# Altium PCB PCB1.PcbDoc
Units mm, origin at the board's own origin, x right, y up, seen from the top; angles counter-clockwise.
Board outline 54.3 x 40 mm, 4 copper layers (Top Layer, Signal Layer 1, Signal Layer 2, Bottom Layer), stack 0.778 mm thick; 40 components, 46 nets, 218 pads, 112 vias.
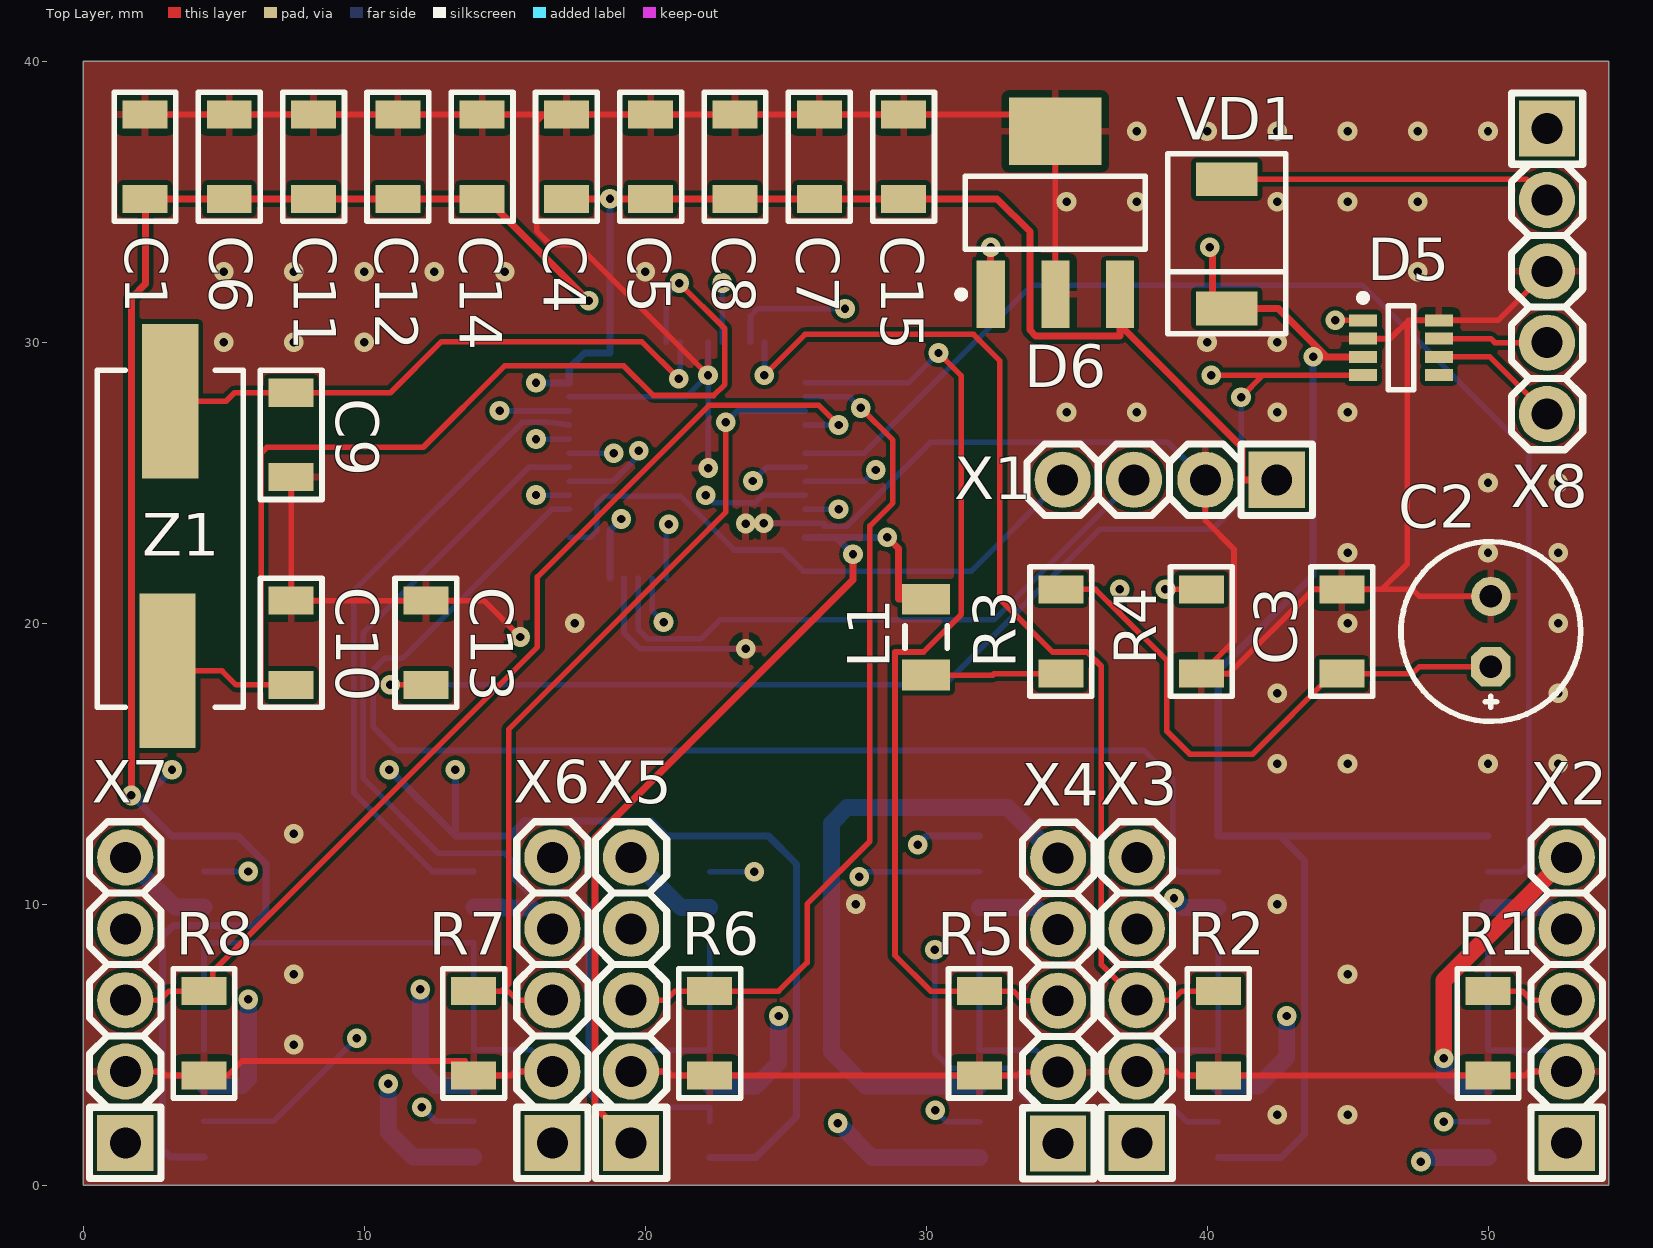
[diagram p0: Top Layer view]
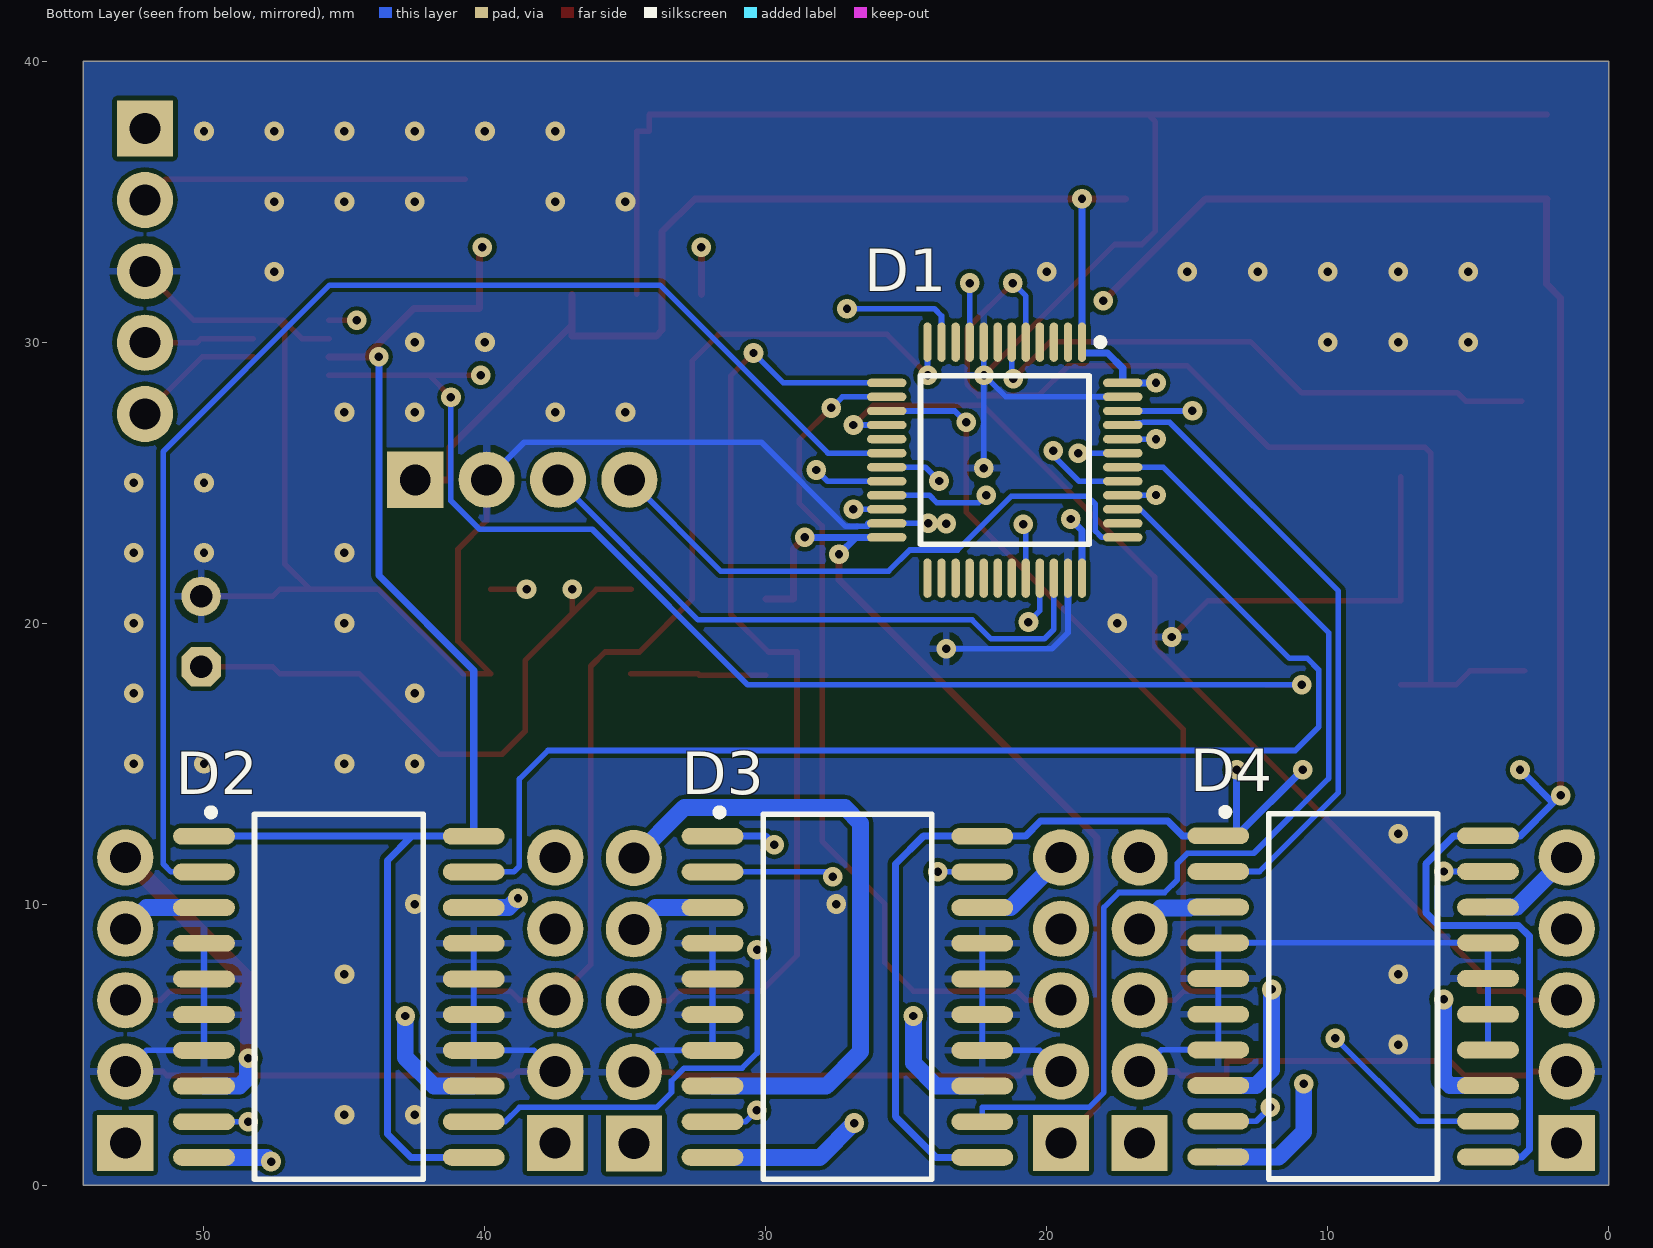
[diagram p1: Bottom Layer view, seen from below]
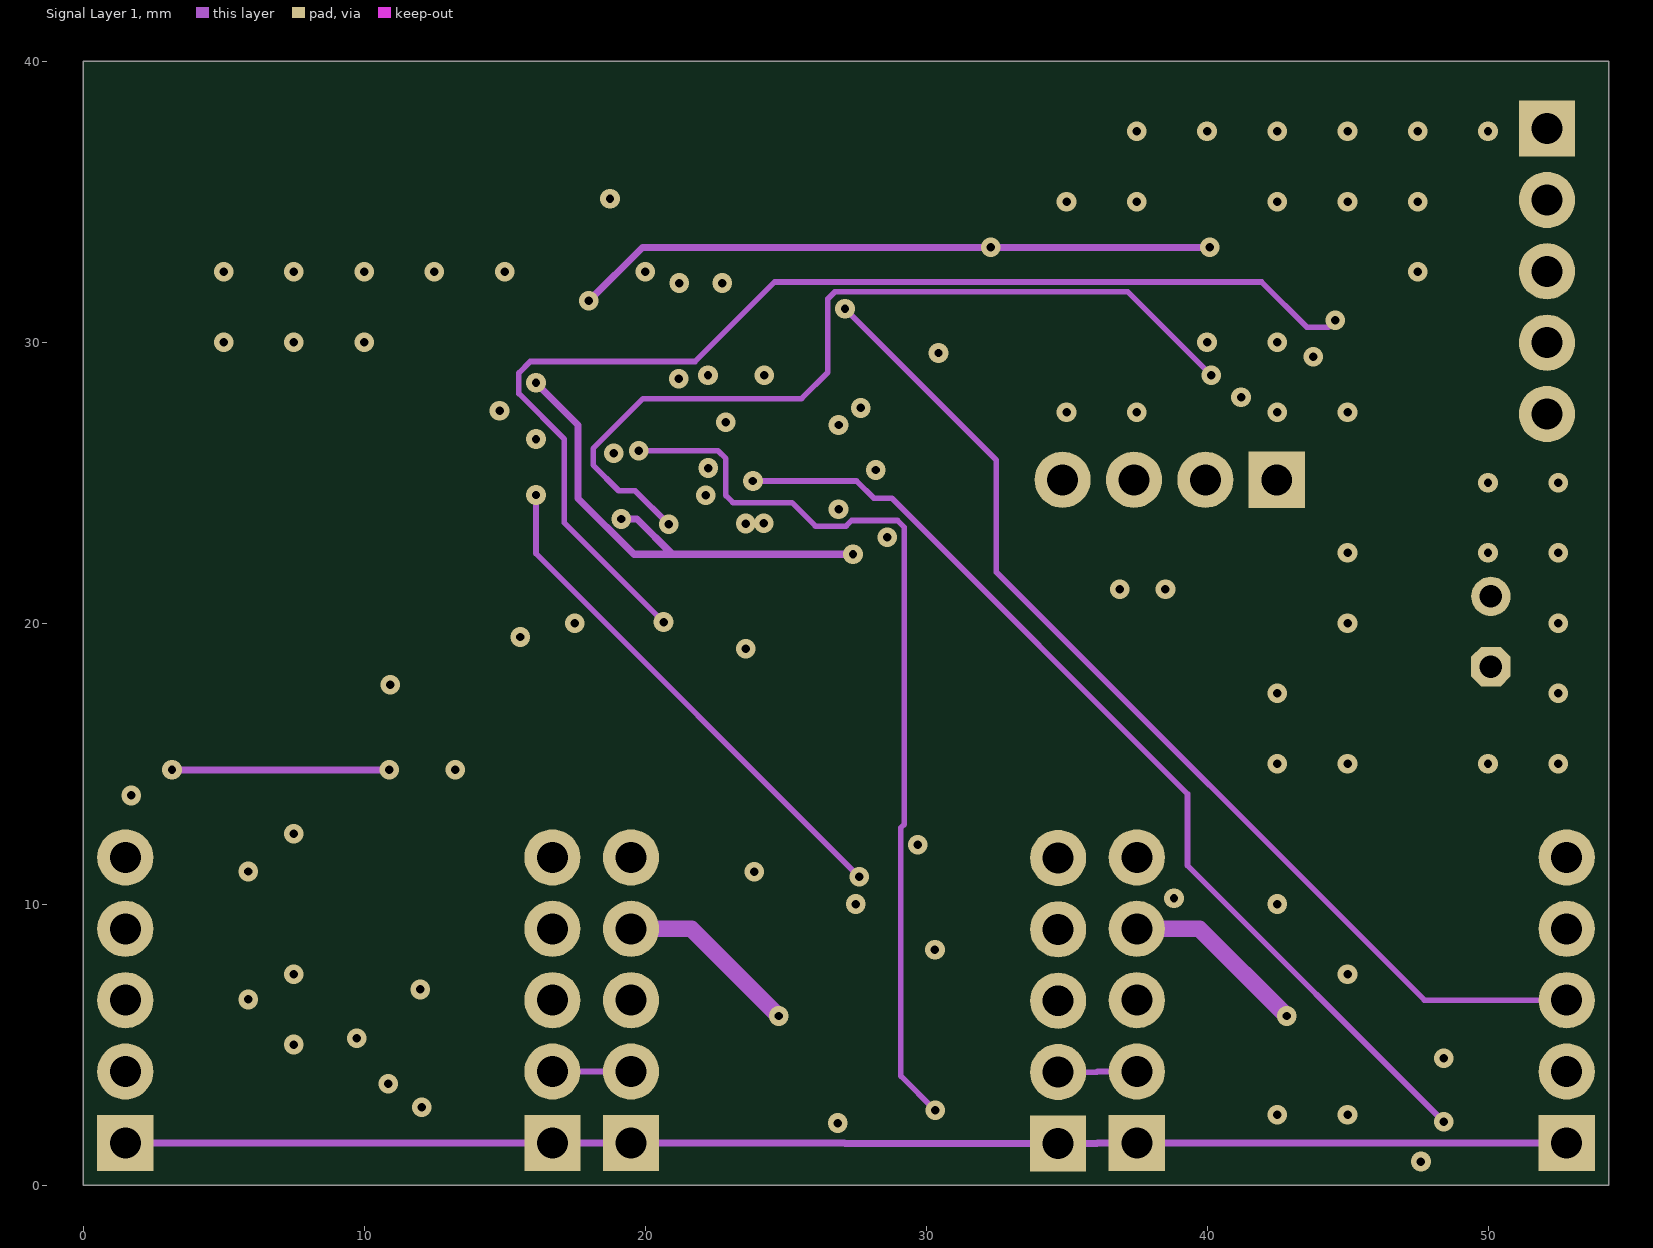
[diagram p2: Signal Layer 1]
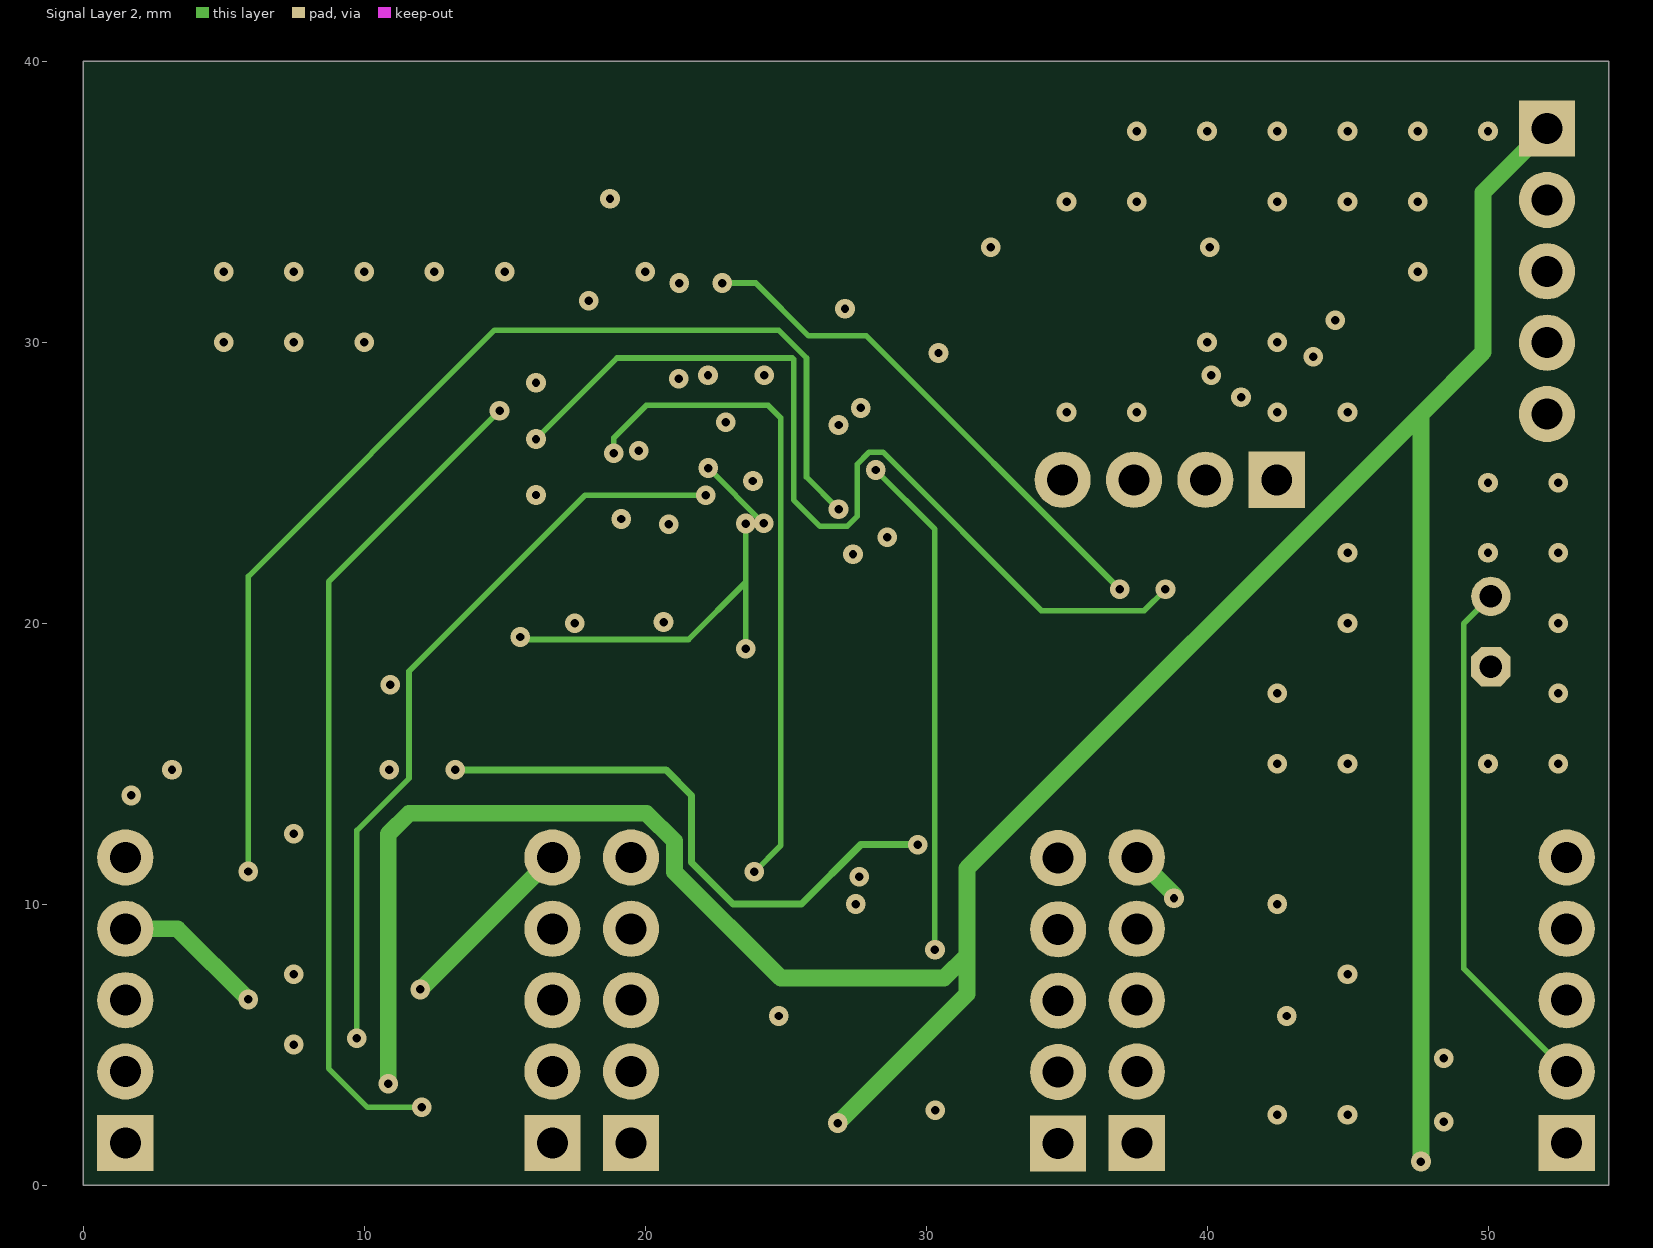
[diagram p3: Signal Layer 2]
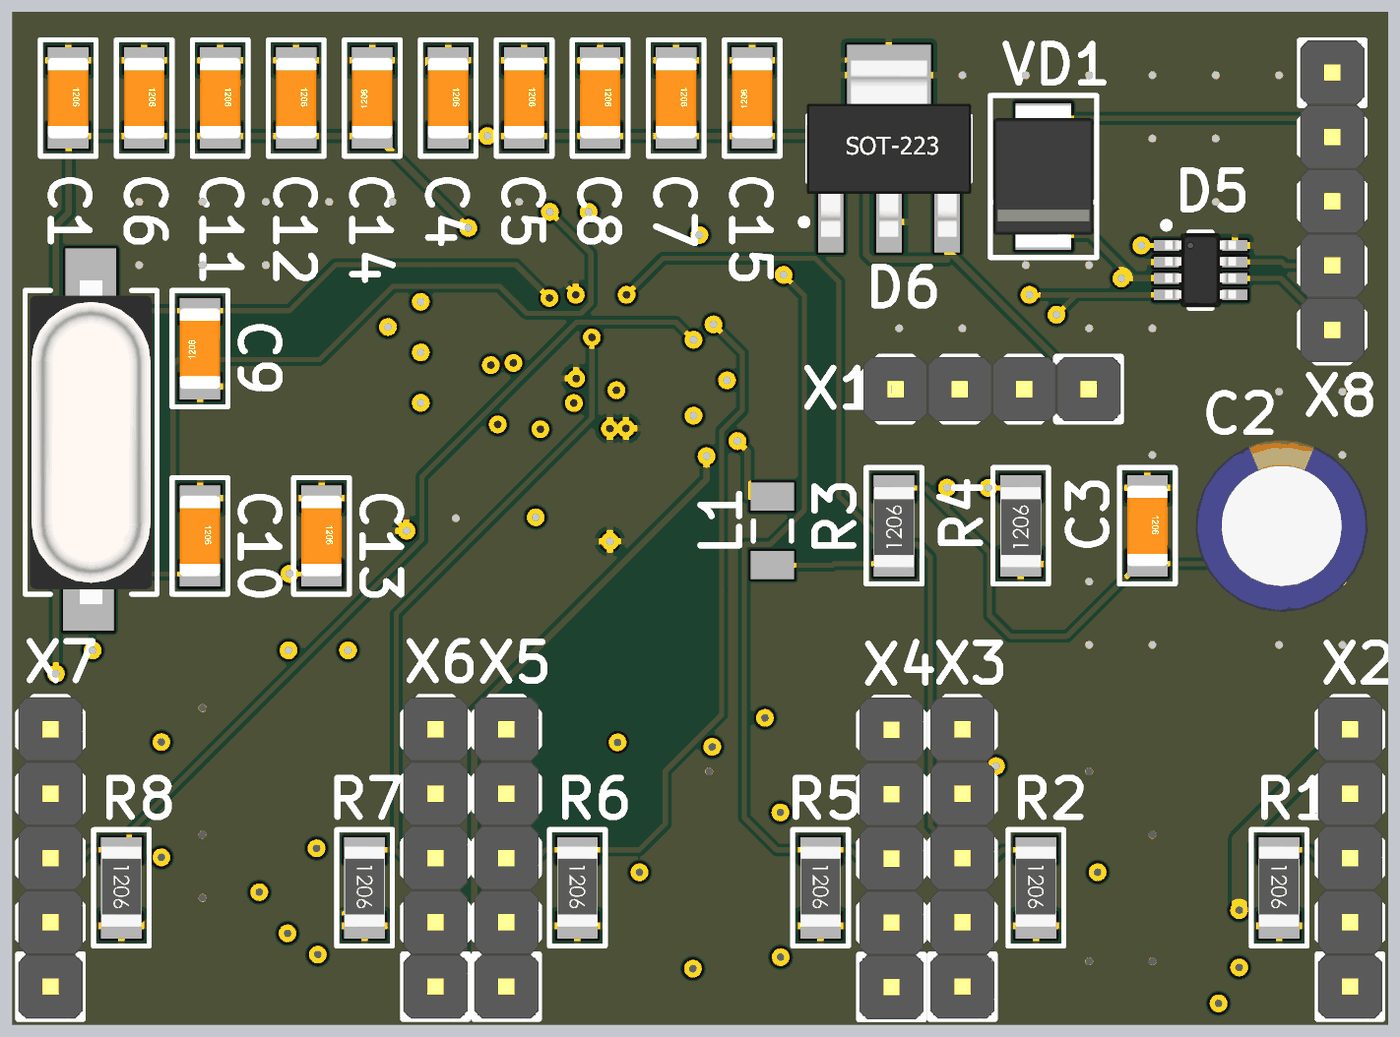
[diagram p4: 3D render of the assembled board from above, using the file's embedded part models]
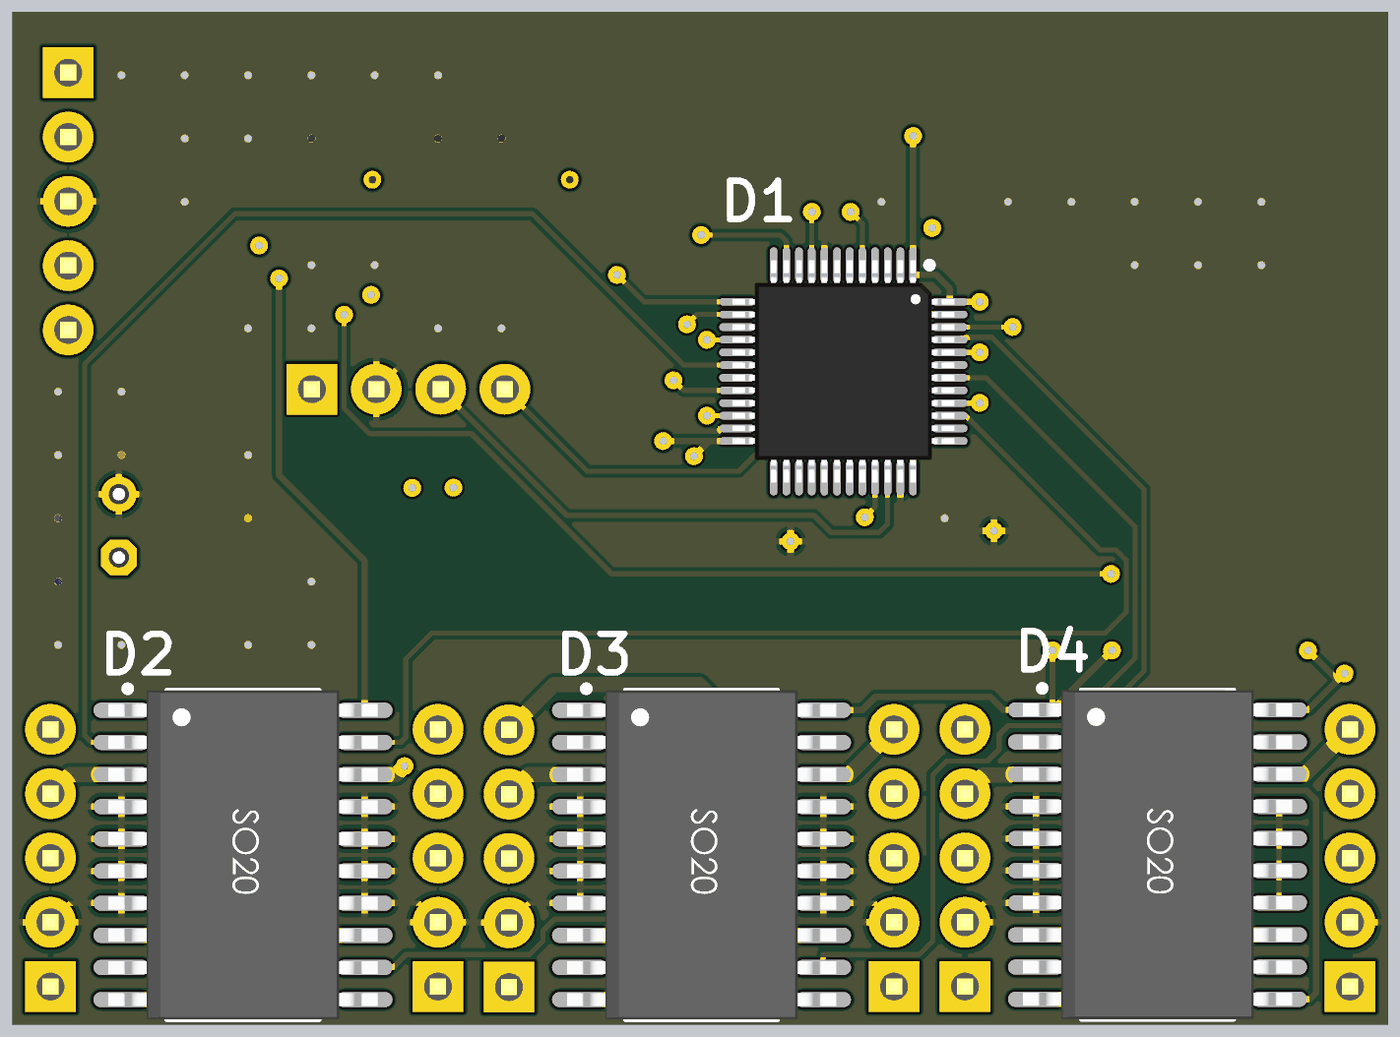
[diagram p5: 3D render of the assembled board from below, using the file's embedded part models]

## Layer stack, top to bottom
Top Solder: solder mask 0.0102, Solder Resist, Dk 3.5
Top Layer: signal copper 0.0356
Dielectric 1: core 0.254, FR-4, Dk 4.2
Signal Layer 1: signal copper 0.036
Dielectric 3: prepreg 0.127, Dk 4.2
Signal Layer 2: signal copper 0.036
Dielectric 2: core 0.254, Dk 4.2
Bottom Layer: signal copper 0.0356
Bottom Solder: solder mask 0.0102, Solder Resist, Dk 3.5

## Board outline
0,0 0,40 54.3,40 54.3,0

## Design rules (kind name [scope] priority, off if disabled: settings)
Clearance [All] p1: gap=0.15 ignorepadtopadclearanceinfootprint=FALSE
DiffPairsRouting [All] p1: maxlimit=0.7 minlimit=0.25 mostfreqgap=0.4 toplayer_minwidth=0.381 toplayer_maxwidth=0.381 toplayer_prefwidth=0.381 midlayer1_minwidth=0.381 midlayer1_maxwidth=0.381 midlayer1_prefwidth=0.381 midlayer2_minwidth=0.381 midlayer2_maxwidth=0.381 midlayer2_prefwidth=0.381 bottomlayer_minwidth=0.381 bottomlayer_maxwidth=0.381 bottomlayer_prefwidth=0.381 maxuncoupledlength=12.7
PolygonConnect [All] p1: connectstyle=Relief reliefconductorwidth=0.254 reliefentries=4 polygonreliefangle="90 Angle" airgapwidth=0.254
RoutingVias [All] p1: holewidth=0.3 width=0.7 viastyle="Through Hole" minholewidth=0.3 minwidth=0.7 maxholewidth=0.3 maxwidth=0.7
SolderMaskExpansion [All] p1: expansion=0.102
Width "Width M6-" [InNet('Motor6_M-')] p1: maxlimit=1 minlimit=0.4 preferedwidth=0.6
Width "Width M6+" [InNet('Motor6_M+')] p2: maxlimit=1 minlimit=0.4 preferedwidth=0.6
Width "Width M5-" [InNet('Motor5_M-')] p3: maxlimit=1 minlimit=0.4 preferedwidth=0.6
Width "Width M5+" [InNet('Motor5_M+')] p4: maxlimit=1 minlimit=0.4 preferedwidth=0.6
Width "Width M4-" [InNet('Motor4_M-')] p5: maxlimit=1 minlimit=0.4 preferedwidth=0.6
Width "Width M4+" [InNet('Motor4_M+')] p6: maxlimit=1 minlimit=0.4 preferedwidth=0.6
Width "Width M3-" [InNet('Motor3_M-')] p7: maxlimit=1 minlimit=0.4 preferedwidth=0.6
Width "Width M3+" [InNet('Motor3_M+')] p8: maxlimit=1 minlimit=0.4 preferedwidth=0.6
Width "Width M2-" [InNet('Motor2_M-')] p9: maxlimit=1 minlimit=0.4 preferedwidth=0.6
Width "Width M2+" [InNet('Motor2_M+')] p10: maxlimit=1 minlimit=0.4 preferedwidth=0.6
Width "Width M1-" [InNet('Motor1_M-')] p11: maxlimit=1 minlimit=0.4 preferedwidth=0.6
Width "Width M1+" [InNet('Motor1_M+')] p12: maxlimit=1 minlimit=0.4 preferedwidth=0.6
Width "Width 12V6" [InNet('12V6')] p13: maxlimit=1 minlimit=0.4 preferedwidth=0.6
Width "Width 5V" [InNet('5V')] p14: maxlimit=1 minlimit=0.2 preferedwidth=0.25
Width "Width 3V3 Pri" [InNet('3V3 Primary')] p15: maxlimit=1 minlimit=0.2 preferedwidth=0.25
Width "Width 3V3" [InNet('3V3')] p16: maxlimit=1 minlimit=0.2 preferedwidth=0.25
Width [All] p17: maxlimit=1 minlimit=0.17 preferedwidth=0.2
29 further rules are at their usual default settings.

## Components (designator, comment, footprint, x,y, rotation, side; value= is the part's Value field where it differs from the comment)
C1 "100nF" CH1206C 2.2,36.6 r270 top
C2 "1µF" D6.3C2.5H11 50.1,19.7 r90 top
C3 "100nF" CH1206C 44.8,19.7 r270 top
C4 "100nF" CH1206C 17.2,36.6 r270 top
C5 "100nF" CH1206C 20.2,36.6 r270 top
C6 "100nF" CH1206C 5.2,36.6 r270 top
C7 "100nF" CH1206C 26.2,36.6 r270 top
C8 "100nF" CH1206C 23.2,36.6 r270 top
C9 "33pF" CH1206C 7.4,26.7 r90 top
C10 "33pF" CH1206C 7.4,19.3 r270 top
C11 "100nF" CH1206C 8.2,36.6 r270 top
C12 "100nF" CH1206C 11.2,36.6 r270 top
C13 "33pF" CH1206C 12.2,19.3 r270 top
C14 "0.47µF" CH1206C 14.2,36.6 r90 top
C15 "47µF" CH1206C 29.2,36.6 r90 top
D1 "STM32F103C8T6" 48-LQFP 21.5,25.8 r270 bottom
D2 "L293D" "20-SOIC (W)" 45.2,6.7 r180 bottom
D3 "L293D" "20-SOIC (W)" 27.1,6.7 r180 bottom
D4 "L293D" "20-SOIC (W)" 9.1,6.715 r180 bottom
D5 "MCP2551" SOT23-8 46.9,29.8 r0 top
D6 "LM3940" SOT223 34.6,34.6 r90 top
L1 "BLM31PG500SN1L" C1206 30,19.5 r90 top value="Ferrite Bead"
R1 "220" CH1206R 50,5.4 r270 top
R2 "220" CH1206R 40.4,5.4 r270 top
R3 "47" CH1206R 34.8,19.7 r90 top
R4 "10k" CH1206R 39.8,19.7 r90 top
R5 "220" CH1206R 31.9,5.4 r270 top
R6 "220" CH1206R 22.3,5.4 r270 top
R7 "220" CH1206R 13.9,5.4 r270 top
R8 "220" CH1206R 4.3,5.4 r270 top
VD1 "STPS4S200UF" DO221AA 40.7,33.5 r270 top
X1 "SWD" "CON: PLS-4" 38.67,25.1 r180 top
X2 "Motor1" "CON: PLS-5" 52.8,6.58 r90 top
X3 "Motor2" "CON: PLS-5" 37.5,6.58 r90 top
X4 "Motor3" "CON: PLS-5" 34.7,6.56 r90 top
X5 "Motor4" "CON: PLS-5" 19.5,6.58 r90 top
X6 "Motor5" "CON: PLS-5" 16.7,6.58 r90 top
X7 "Motor6" "CON: PLS-5" 1.5,6.58 r90 top
X8 "0533750510" "CON: PLS-5" 52.1,32.52 r270 top
Z1 "8MHz" HC-49/US 3.1,23 r270 top

## Footprints (in the part's own frame and the unit in brackets; to place one, negate y for a bottom-side part, rotate by r counter-clockwise, add the part's x,y. Pads: shape width x height; smd on the part's side, far side on the other; paste and mask are expansions set on the pad)
"20-SOIC (W)" [mm]
  rrect100% 2.2x0.6 smd: 1(-4.8,5.715) 2(-4.8,4.445) 3(-4.8,3.175) 4(-4.8,1.905) 5(-4.8,0.635) 6(-4.8,-0.635) 7(-4.8,-1.905) 8(-4.8,-3.175) 9(-4.8,-4.445) 10(-4.8,-5.715) 11(4.8,-5.715) 12(4.8,-4.445) 13(4.8,-3.175) 14(4.8,-1.905) 15(4.8,-0.635) 16(4.8,0.635) 17(4.8,1.905) 18(4.8,3.175) 19(4.8,4.445) 20(4.8,5.715)
  round 0.5 on Mech2: ""(-4.7,5.9)
  silkscreen extent -4.68,-6.5 3,6.69, body extent -5.31,-6.5 5.32,6.5, height 2.66
48-LQFP [mm] "QFP, 48-Leads, Body 7x7mm, Pitch 0.5mm, IPC Medium Density"
  oval 1.4x0.3 smd: 1(-4.2,2.75) 2(-4.2,2.25) 3(-4.2,1.75) 4(-4.2,1.25) 5(-4.2,0.75) 6(-4.2,0.25) 7(-4.2,-0.25) 8(-4.2,-0.75) 9(-4.2,-1.25) 10(-4.2,-1.75) 11(-4.2,-2.25) 12(-4.2,-2.75) 25(4.2,-2.75) 26(4.2,-2.25) 27(4.2,-1.75) 28(4.2,-1.25) 29(4.2,-0.75) 30(4.2,-0.25) 31(4.2,0.25) 32(4.2,0.75) 33(4.2,1.25) 34(4.2,1.75) 35(4.2,2.25) 36(4.2,2.75)
  round 0.5 on Mech2: 2(-4,4)
  oval 0.3x1.4 smd: 13(-2.75,-4.2) 14(-2.25,-4.2) 15(-1.75,-4.2) 16(-1.25,-4.2) 17(-0.75,-4.2) 18(-0.25,-4.2) 19(0.25,-4.2) 20(0.75,-4.2) 21(1.25,-4.2) 22(1.75,-4.2) 23(2.25,-4.2) 24(2.75,-4.2) 37(2.75,4.2) 38(2.25,4.2) 39(1.75,4.2) 40(1.25,4.2) 41(0.75,4.2) 42(0.25,4.2) 43(-0.25,4.2) 44(-0.75,4.2) 45(-1.25,4.2) 46(-1.75,4.2) 47(-2.25,4.2) 48(-2.75,4.2)
  silkscreen extent -4.32,-3 3,3.52, body extent -4.39,-4.39 4.39,4.39, height 1.55
C1206 [mm] "Chip Capacitor, Body 3.2x1.6mm, IPC High Density"
  rect 1.1x1.7 smd: 1(-1.35,0) 2(1.35,0)
  silkscreen extent -0.4,-0.75 0.4,0.75, body extent -1.7,-0.9 1.7,0.9, height 1.3
CH1206C [mm] "Non polar chip capacitor, size 1206"
  rect 1x1.6 smd: 1(-1.5,0) 2(1.5,0)
  silkscreen extent -2.3,-1.1 2.3,1.1, body extent -1.6,-0.8 1.6,0.8, height 1
CH1206R [mm] "Chip Resistor, 2-Leads, Body 3,0x1,5mm, IPC Low Density"
  rect 1x1.6 smd: 1(-1.5,0) 2(1.5,0)
  silkscreen extent -2.3,-1.1 2.3,1.1, body extent -1.65,-0.8 1.55,0.8, height 0.47
"CON: PLS-4" [mm] "PLS-40 4 pin header"
  rect 2x2 hole 1.1: 1(-3.81,0)
  round 2 hole 1.1: 2(-1.27,0) 3(1.27,0) 4(3.81,0)
  silkscreen extent -5.08,-1.27 5.08,1.27, body extent -5.08,-1.27 5.08,1.27, height 8.54
"CON: PLS-5" [mm]
  rect 2x2 hole 1.1: 1(-5.08,0)
  round 2 hole 1.1: 2(-2.54,0) 3(0,0) 4(2.54,0) 5(5.08,0)
  silkscreen extent -6.35,-1.27 6.35,1.27, body extent -6.35,-1.27 6.35,1.27, height 8.54
D6.3C2.5H11 [mm] "Polar capacitor, diameter 6.3 mm, leads clearance 2.5 mm, height 11 mm"
  oct 1.4x1.4 hole 0.8: 1(-1.25,0)
  round 1.4 hole 0.8: 2(1.25,0)
  silkscreen extent -3.2,-3.2 3.2,3.2, body extent -3.4,-3.4 3.4,3.4, height 12.5
DO221AA [mm]
  rect 1.2x2.2 smd: 1(-2.3,0) 2(2.3,0)
  silkscreen extent -3.2,-2.1 3.2,2.1, body extent -2.8,-1.97 2.8,1.98, height 1.1
HC-49/US [mm] "Resonator"
  rect 5.5x2 smd: 1(-4.9,0) 3(4.7,-0.1)
  round 0.5 on Mech1: ""(-4.2,-1.9)
  silkscreen extent -6,-2.6 6,2.6, body extent -6.4,-2.42 6.4,2.41, height 4.3
SOT23-8 [mm] "8-Lead Small Outline Transistor Package [SOT-23]"
  rect 1x0.42 smd: 1(-1.35,0.975) 2(-1.35,0.325) 3(-1.35,-0.325) 4(-1.35,-0.975) 5(1.35,-0.975) 6(1.35,-0.325) 7(1.35,0.325) 8(1.35,0.975)
  round 0.5 on Mech1: ""(-0.9,1)
  silkscreen extent -1.47,-1.5 0.45,1.9, body extent -1.4,-1.47 1.4,1.47, height 1.2
SOT223 [mm] "SOT223, 4-Leads, Body 6,50x7,00mm (avg), Pitch 2,30mm, IPC Medium Density"
  rect 2.4x1 smd: 1(-2.9,2.3) 2(-2.9,0) 3(-2.9,-2.3)
  rect 2.4x3.3 smd: 4(2.9,0)
  round 0.5 on Mech1: ""(-3,2.7)
  silkscreen extent -3.02,-3.2 1.3,3.47, body extent -3.48,-3.25 3.48,3.25, height 1.65

## Part data
C1 C3 C4 C5 C6 C7 C8 C9 C10 C11 C12 C13 C15: library part Capacitor, Manufacturer="Murata Electronics North America"
  C1 C3 C4 C5 C6 C7 C8 C11 C12: ComponentKind=1206, HelpURL=https://www.digikey.com/product-detail/en/GRM31M7U1H104JA01L/490-6524-1-ND/3845721/?itemSeq=292160367, Model=GRM31M7U1H104JA01L
  C9 C10 C13: ComponentKind=1206, HelpURL=https://www.digikey.com/product-detail/en/murata-electronics-north-america/GRM31A7U3A330JW31D/490-11635-1-ND/5333475, Model=GRM31A7U3A330JW31D
  C15: ComponentKind="1206 ±10%", HelpURL=https://www.digikey.com/product-detail/en/murata-electronics-north-america/GRT31CR61A476KE13L/490-12438-1-ND/5417139, Model=GRT31CR61A476KE13L
C2: library part AlumCap, Manufacturer=Nichicon, ComponentKind="D-6.30mm, H-12.50mm, L-2.50mm", HelpURL=https://www.digikey.com/product-detail/en/UPS2D010MED1TD/493-5390-1-ND/3129727/?itemSeq=292930108, Model=UPS2D010MED1TD
C14: library part Capacitor, Manufacturer="Wurth Electronics Inc.", ComponentKind="1206 ±10%", HelpURL=https://www.digikey.com/product-detail/en/wurth-electronics-inc/885012208034/732-7690-1-ND/5454317, Model=885012208034
D1: "Cortex-M3", Manufacturer="ST Microelectronics", ComponentKind=48-LQFP, HelpURL=https://www.digikey.com/product-detail/en/stmicroelectronics/STM32F103C8T6/497-6063-ND/1646338, Model=STM32F103C8T6
D2 D3 D4: "Driver DC", Manufacturer=Chine, ComponentKind=20-SOIC, HelpURL=https://www.aliexpress.com/item/L293DD-SOP-20/32820416384.html?spm=a2g0o.cart.0.0.75653c006KpWLf, Model=L293DD
D5: "CAN Transceiver", Manufacturer=China, ComponentKind=SOT23-8, HelpURL=https://www.aliexpress.com/item/5pcs-lot-MCP2551-I-SN-SOP-8-MCP2551-High-speed-CAN-transceiver-IC-In-Stock/32957904723.html?spm=2114.search0604.3.9.23fb55704Db44W&ws_ab_test=searchweb0_0,searchweb201602_2_10065_10068_319_317_10696_453_10084_454_10083_10618_10307_10301_537_536_10059_10884_10889_10887_321_322_10915_10103_10914_10911_10910,searchweb201603_52,ppcSwitch_0&algo_expid=0b18bd05-c5b2-42c5-a3b0-7fc04afd9d1c-1&algo_pvid=0b18bd05-c5b2-42c5-a3b0-7fc04afd9d1c, Model=MCP2551
D6: "LDO", ComponentKind=SOT-223
L1: library part Inductor, Manufacturer="Murata Electronics North America", ComponentKind="Power Line Ferrite Bead", HelpURL=https://www.digikey.com/product-detail/en/murata-electronics-north-america/BLM31PG500SN1L/490-1055-1-ND/584501, Model=BLM31PG500SN1L
R1 R2 R5 R6 R7 R8: library part Resistor, Manufacturer="Vishay Dale", ComponentKind=1206, HelpURL=https://www.digikey.com/product-detail/en/CRCW1206220RJNEAC/541-4204-1-ND/7928887/?itemSeq=292844989, Model=CRCW1206220RJNEAC
R3: library part Resistor
R4: library part Resistor, Manufacturer="Stackpole Electronics Inc", ComponentKind=1206, HelpURL=https://www.digikey.com/product-detail/en/stackpole-electronics-inc/RMCF1206JT10K0/RMCF1206JT10K0CT-ND/1942803, Model=RMCF1206JT10K0
VD1: library part "Diod Schottky", Manufacturer=STMicroelectronics, ComponentKind="Äèîä Øîòòêè äëÿ çàùèòû îò íåïðàâèëüíîé ïîëÿðíîñòè", HelpURL=https://www.digikey.com/product-detail/en/STPS4S200UF/497-15321-1-ND/5170863/?itemSeq=292860513, Model=STPS4S200UF
X1: library part 4-Connector, Manufacturer=Molex, ComponentKind="Connector Header Through Hole 4 position 0.098\" (2.50mm)", HelpURL=https://www.digikey.com/products/en?keywords=0533750410, Model=0533750410
X2 X3 X4 X5 X6 X7 X8: library part 5-Connector, Manufacturer=Molex, ComponentKind="Connector Header Through Hole 5 position 0.098\" (2.50mm)", HelpURL=https://www.digikey.com/products/en?keywords=0533750510, Model=0533750510
Z1: library part Oscillator, Manufacturer="ECS Inc.", ComponentKind=HC-49/US, HelpURL=https://www.digikey.com/product-detail/en/ecs-inc/ECS-80-20-5PX-TR/XC2076CT-ND/5875560, Model=ECS-80-20-5PX-TR

## Via types
v1: diameter 0.7, hole 0.3, Top Layer to Bottom Layer, 63 vias
v2: diameter 0.7, hole 0.3, Top Layer to Bottom Layer, tented both sides, 49 vias

## Nets (pads, with @x,y where several pads share a name; then routed paths per layer and width w, separated by ;. In a path a pad name is that pad's centre, name@x,y a point inside that pad or via, vN(x,y) a via of type N, cw(c..) or ccw(c..) an arc to the next point about the centre after c; other vN are vias at no path point)
3V3: C4.2 C5.2 C7.2 C8.2 C15.1 D1.1 D1.24 D1.36 D1.48 D6.3 L1.2 X1.1 X2.1 X3.1 X4.1 X5.1 X6.1 X7.1 | length 146.3
  Top Layer w0.25: C4.2 18.681,35.1 v1(18.75,35.1) C5.2 C8.2 C7.2 C15.1 32.524,35.1 33.693,33.932 33.693,30.426 33.896,30.223 36.9,30.223 D6.3@36.9,30.604 ; X5.1 18.224,2.776 18.224,12.367 27.399,21.542 v1(27.399,22.451) ; v1(28.618,23.05) 29.019,22.649 29.019,20.85 L1.2 ; D6.3 D6.3@36.9,30.604 ; X1.1 41.237,25.1 41.237,26.268 D6.3@36.9,30.604
  Signal Layer 1 w0.25: X7.1 X6.1 X5.1 27.089,1.5 27.109,1.48 X4.1 36.08,1.48 36.1,1.5 X3.1 X2.1 ; v1(16.116,28.55) 17.618,27.048 17.618,24.432 19.599,22.451 20.967,22.451 ; v1(19.156,23.705) 19.713,23.705 20.967,22.451 ; v1(27.399,22.451) 20.967,22.451
  Bottom Layer w0.25: v1(16.116,28.55) D1.48 17.3,29.07 17.843,29.614 18.75,29.614 D1.1 v1(18.75,35.1) ; D1.36 18.75,23.299 v1(19.156,23.705) ; D1.24 26.8,23.05 ; v1(27.399,22.451) 26.8,23.05 ; v1(28.618,23.05) 26.8,23.05
5V: C1.2 C6.2 C11.2 C12.2 C14.1 D2.1 D2.11 D2.20 D3.1 D3.11 D3.20 D4.1 D4.11 D4.20 D5.3 D6.1 VD1.2 | length 199
  Top Layer w0.25: v1(1.714,13.866) 1.714,31.569 2.222,32.077 C1.2@2.222,35.1 ; C1.2 C1.2@2.222,35.1 ; v1(17.996,31.468) 14.363,35.1 C14.1 C12.2 C11.2 C6.2 C1.2@2.222,35.1 ; D6.1 v1(32.3,33.373) ; v1(40.094,33.373) 40.195,33.271 40.195,31.2 VD1.2 42.534,31.2 44.259,29.475 ; v1(43.777,29.475) 44.259,29.475 ; D5.3 44.259,29.475
  Signal Layer 1 w0.25: v1(3.162,14.78) v1(10.896,14.78) ; v1(17.996,31.468) 19.901,33.373 v1(32.3,33.373) v1(40.094,33.373)
  Signal Layer 2 w0.25: v1(13.246,14.78) 20.739,14.78 21.653,13.866 21.653,11.478 23.126,10.005 25.565,10.005 27.673,12.113 v1(29.705,12.113)
  Bottom Layer w0.25: v1(1.714,13.866) 1.981,13.599 ; v1(3.162,14.78) 1.981,13.599 ; D4.11 3.099,1 2.832,1.267 2.832,8.862 3.213,9.243 6.058,9.243 6.515,9.7 6.515,11.427 5.512,12.43 D4.20 3.15,12.43 1.981,13.599 ; v1(10.896,14.78) D4.1@13.246,12.43 ; v1(13.246,14.78) D4.1@13.246,12.43 ; D3.11 23.939,0.985 25.387,2.433 25.387,11.427 24.399,12.415 D3.20 20.764,12.415 20.228,12.951 15.697,12.951 15.176,12.43 D4.1 D4.1@13.246,12.43 ; v1(29.705,12.113) 30.007,12.415 D3.1 ; D2.11 42.634,0.985 43.472,1.823 43.472,11.551 42.608,12.415 ; v1(43.777,29.475) 43.777,21.689 40.398,18.311 40.398,12.415 D2.20 42.608,12.415 ; D2.1 42.608,12.415
12V6: D2.10 D3.10 D4.10 X8.1 | length 118.8
  Signal Layer 2 w0.6: v1(10.858,3.604) 10.858,12.494 11.595,13.231 20.053,13.231 21.044,12.24 21.044,11.148 24.828,7.363 30.645,7.363 31.458,8.176 ; v1(26.86,2.207) 31.458,6.804 31.458,8.176 ; v1(47.612,0.835) 47.612,27.429 ; X8.1 49.822,35.322 49.822,29.639 47.612,27.429 ; 31.458,8.176 31.458,11.275 47.612,27.429
  Bottom Layer w0.6: v1(10.858,3.604) 10.858,1.889 11.747,1 D4.10 ; v1(26.86,2.207) 28.082,0.985 D3.10 ; v1(47.612,0.835) 47.762,0.985 D2.10
CAN_RX: C13.2 D1.32 D5.4 | length 77.6
  Top Layer w0.2: v1(10.934,17.803) 10.937,17.8 C13.2 ; v1(40.144,28.825) 41.997,28.825 ; v1(41.211,28.039) 41.997,28.825 ; D5.4 41.997,28.825
  Signal Layer 1 w0.2: v1(20.84,23.518) 19.647,24.711 19.062,24.711 18.148,25.626 18.148,26.21 19.926,27.988 25.565,27.988 26.505,28.928 26.505,31.544 26.749,31.788 37.181,31.788 v1(40.144,28.825)
  Bottom Layer w0.2: v1(10.934,17.803) 30.645,17.803 36.182,23.34 40.195,23.34 41.211,24.356 v1(41.211,28.039) ; D1.32 20.75,23.427 v1(20.84,23.518)
CAN_TX: D1.33 D5.1 | length 44.9
  Top Layer w0.2: v1(44.564,30.775) D5.1
  Signal Layer 1 w0.2: v1(20.656,20.038) 17.128,23.566 17.128,26.544 15.506,28.166 15.506,28.902 15.913,29.309 21.78,29.309 24.61,32.138 41.945,32.138 43.555,30.528 44.317,30.528 v1(44.564,30.775)
  Bottom Layer w0.2: D1.33 20.25,20.444 v1(20.656,20.038)
"Control M1+": D1.18 D2.2 | length 46.9
  Bottom Layer w0.2: D1.18 27.792,26.05 33.769,32.027 45.529,32.027 51.447,26.108 51.447,11.424 51.168,11.145 D2.2
"Control M1-": D1.19 D2.9 | length 39.2
  Signal Layer 1 w0.2: v1(23.838,25.056) 27.526,25.056 28.14,24.442 28.785,24.442 39.306,13.921 39.306,11.374 v1(48.425,2.255)
  Bottom Layer w0.2: v1(23.838,25.056) 24.332,25.55 D1.19 ; v1(48.425,2.255) D2.9
"Control M2+": D1.20 D2.12 | length 35.6
  Signal Layer 2 w0.2: v1(28.206,25.448) 30.315,23.34 v1(30.315,8.379)
  Bottom Layer w0.2: D1.20 27.808,25.05 v1(28.206,25.448) ; v1(30.315,8.379) 30.315,4.696 30.848,4.163 32.905,4.163 33.363,3.706 33.363,3.299 33.896,2.766 38.773,2.766 39.284,2.255 D2.12
"Control M2-": D1.39 D2.19 | length 45.4
  Bottom Layer w0.2: D1.39 16.674,24.05 11.366,18.742 10.731,18.742 10.325,18.336 10.325,16.304 11.163,15.466 37.757,15.466 38.773,14.45 38.773,11.348 38.976,11.145 D2.19
"Control M3+": D1.40 D3.2 | length 23.9
  Signal Layer 1 w0.2: v1(16.116,24.559) 16.116,22.476 v1(27.622,10.97)
  Bottom Layer w0.2: v1(16.116,24.559) 16.125,24.55 D1.40 ; v1(27.622,10.97) 27.797,11.145 D3.2
"Control M3-": D1.41 D3.9 | length 37.6
  Signal Layer 1 w0.2: v1(19.774,26.134) 22.593,26.134 22.872,25.854 22.872,24.543 23.126,24.289 25.225,24.289 26.064,23.45 27.148,23.45 27.348,23.65 28.984,23.65 29.218,23.416 29.218,12.833 29.105,12.72 29.105,3.879 v1(30.323,2.661)
  Bottom Layer w0.2: D1.41 18.859,25.05 19.774,25.964 v1(19.774,26.134) ; v1(30.323,2.661) 30.729,2.255 D3.9
"Control M4+": D1.42 D3.12 | length 36.8
  Bottom Layer w0.2: D1.42 15.862,25.55 9.975,19.662 9.975,14.47 12.636,11.808 14.998,11.808 15.354,11.453 15.354,10.867 15.811,10.41 17.437,10.41 17.97,9.877 17.97,3.299 18.504,2.766 22.3,2.766 D3.12
"Control M4-": D1.43 D3.19 | length 26.9
  Signal Layer 2 w0.2: v1(18.885,26.05) 18.885,26.591 20.043,27.749 24.381,27.749 24.828,27.302 24.828,12.088 v1(23.888,11.148)
  Bottom Layer w0.2: D1.43 v1(18.885,26.05) ; D3.19 23.886,11.145 v1(23.888,11.148)
"Control M5+": D1.45 D4.2 | length 22.8
  Bottom Layer w0.2: D4.2 12.433,11.16 9.625,13.968 9.625,21.141 15.634,27.15 16.575,27.15 D1.45
"Control M5-": D1.46 D4.9 | length 34.4
  Signal Layer 2 w0.2: v1(12.052,2.766) 10.122,2.766 8.734,4.153 8.734,21.47 v1(14.821,27.556)
  Bottom Layer w0.2: v1(12.052,2.766) 12.548,2.27 D4.9 ; v1(14.821,27.556) 14.827,27.55 D1.46
"Control M6+": D1.21 D4.12 | length 37.4
  Signal Layer 2 w0.2: v1(9.741,5.23) 9.741,12.621 11.595,14.475 11.595,18.285 17.86,24.55 v1(22.161,24.55)
  Bottom Layer w0.2: D4.12 6.781,2.27 v1(9.741,5.23) ; v1(22.161,24.55) 22.422,24.289 23.923,24.289 24.184,24.55 D1.21
"Control M6-": D1.22 D4.19 | length 43
  Signal Layer 2 w0.2: v1(5.88,11.16) 5.88,21.663 14.643,30.426 24.752,30.426 25.743,29.436 25.743,25.194 v1(26.886,24.051)
  Bottom Layer w0.2: D4.19 v1(5.88,11.16) ; D1.22 v1(26.886,24.051) v1(26.886,24.051)
GND: C1.1 C2.2 C3.1 C4.1 C5.1 C6.1 C7.1 C8.1 C9.1 C10.1 C11.1 C12.1 C13.1 C14.2 C15.2 D1.8 D1.23 D1.35 D1.47 D2.4 D2.5 D2.6 D2.7 D2.14 D2.15 D2.16 D2.17 D3.4 D3.5 D3.6 D3.7 D3.14 D3.15 D3.16 D3.17 D4.4 D4.5 D4.6 D4.7 D4.14 D4.15 D4.16 D4.17 D5.2 D5.8 D6.2 D6.4 R1.2 R2.2 R4.1 R5.2 R6.2 R7.2 R8.2 X1.2 X2.2 X3.2 X4.2 X5.2 X6.2 X7.2 X8.3 | length 271.4
  Top Layer w0.2: X7.2 2.806,4.04 2.946,3.9 R8.2 5.143,3.9 5.66,4.417 13.601,4.417 13.601,3.9 R7.2 15.227,3.9 15.367,4.04 X6.2 ; C1.1 C6.1 C11.1 C12.1 C14.2 16.398,38.1 ; C9.1 C10.1 C13.1 14.262,20.8 v1(15.557,19.504) ; X5.2 20.815,4.04 20.955,3.9 R6.2 R5.2 33.236,3.9 33.356,4.02 X4.2 ; v1(22.237,28.826) 17.589,33.474 16.624,33.474 16.141,33.957 16.141,37.843 16.398,38.1 ; D6.2 D6.4 34.15,37.5 34.15,38.1 C15.2 C7.1 C8.1 C5.1 C4.1 16.398,38.1 ; X3.2 38.874,4.04 39.014,3.9 R2.2 R1.2 51.32,3.9 51.46,4.04 X2.2 ; X1.2 39.94,23.646 40.957,22.629 40.957,19.357 R4.1 40.779,18.2 43.779,21.2 C3.1 46.215,21.2 ; D5.2 46.52,30.125 47.17,30.775 47.376,30.775 ; C2.2 47.557,20.95 47.307,21.2 46.215,21.2 ; X8.3 50.355,30.775 D5.8 47.376,30.775 ; 46.215,21.2 47.129,22.114 47.129,30.528 47.376,30.775
  Signal Layer 1 w0.2: X6.2 X5.2 ; X4.2 36.08,4.02 36.1,4.04 X3.2
  Signal Layer 2 w0.2: v1(15.557,19.504) 15.645,19.417 21.546,19.417 23.584,21.455 ; v1(22.25,25.519) v1(24.219,23.55) ; v1(23.584,19.088) 23.584,21.455 ; v1(23.584,23.543) 23.584,21.455 ; C2.2 49.136,19.986 49.136,7.704 X2.2
  Bottom Layer w0.2: D4.14 D4.15 D4.16 D4.17 D4.4 D4.5 D4.6 D4.7 15.93,4.81 X6.2 ; D1.47 21.461,28.05 v1(22.237,28.826) v1@22.25,28.839 ; D1.35 19.25,19.657 19.819,19.088 v1(23.584,19.088) ; X5.2 20.255,4.795 D3.14 D3.15 D3.16 D3.17 ; v1(22.25,25.519) v1@22.25,28.839 ; D1.8 v1@22.25,28.839 ; v1(23.584,23.543) 23.591,23.55 v1(24.219,23.55) D1.23 26.378,23.55 26.378,23.441 27.165,23.441 30.162,26.439 38.601,26.439 X1.2 ; D3.4 D3.5 D3.6 D3.7 33.925,4.795 X4.2 ; X3.2 38.255,4.795 D2.14 D2.15 D2.16 D2.17 ; D2.4 D2.5 D2.6 D2.7 52.045,4.795 X2.2
  other v2: 42.5,2.5 45,2.5 7.5,5 7.5,7.5 45,7.5 27.5,10 42.5,10 7.5,12.5 42.5,15 45,15 50,15 52.5,15 42.5,17.5 52.5,17.5 17.5,20 45,20 52.5,20 45,22.5 50,22.5 52.5,22.5 50,25 52.5,25 35,27.5 37.5,27.5 42.5,27.5 45,27.5 5,30 7.5,30 10,30 40,30 42.5,30 5,32.5 7.5,32.5 10,32.5 12.5,32.5 15,32.5 20,32.5 47.5,32.5 35,35 37.5,35 42.5,35 45,35 47.5,35 37.5,37.5 40,37.5 42.5,37.5 45,37.5 47.5,37.5 50,37.5
HallSensor1: D1.11 R1.1 X2.3 | length 45.6
  Top Layer w0.2: R1.1 51.219,6.9 51.539,6.58 X2.3
  Signal Layer 1 w0.2: v1(27.114,31.188) 32.499,25.804 32.499,21.816 47.735,6.58 X2.3
  Bottom Layer w0.2: D1.11 23.75,30.934 24.004,31.188 v1(27.114,31.188)
HallSensor2: D1.12 R2.1 X3.3 | length 39.1
  Top Layer w0.2: v1(24.244,28.826) 25.692,30.274 31.686,30.274 32.626,29.334 32.626,20.851 34.506,18.971 35.725,18.971 36.233,18.463 36.233,7.847 X3.3 38.773,6.58 39.093,6.9 R2.1
  Bottom Layer w0.2: v1(24.244,28.826) 24.25,28.832 D1.12
HallSensor3: D1.13 R5.1 X4.3 | length 35
  Top Layer w0.2: v1(30.442,29.614) 31.254,28.801 31.254,20.317 29.908,18.971 28.892,18.971 28.892,8.176 30.168,6.9 R5.1 33.109,6.9 33.449,6.56 X4.3
  Bottom Layer w0.2: D1.13 29.378,28.55 v1(30.442,29.614)
HallSensor4: D1.14 R6.1 X5.3 | length 30.4
  Top Layer w0.2: X5.3 20.739,6.58 21.059,6.9 R6.1 24.752,6.9 25.768,7.916 25.768,10.005 27.999,12.236 27.999,23.462 28.816,24.28 28.816,26.515 v1(27.673,27.658)
  Bottom Layer w0.2: D1.14 27.281,28.05 v1(27.673,27.658)
HallSensor5: D1.15 R7.1 X6.3 | length 29.5
  Top Layer w0.2: R7.1 14.891,6.9 ; X6.3 15.445,6.58 15.125,6.9 14.891,6.9 ; v1(22.872,27.144) 22.872,23.949 15.151,16.228 15.151,7.16 14.891,6.9
  Bottom Layer w0.2: v1(22.872,27.144) 23.279,27.55 D1.15
HallSensor6: D1.16 R8.1 X7.3 | length 37.5
  Top Layer w0.2: X7.3 2.73,6.58 3.05,6.9 R8.1 4.61,6.9 4.61,7.592 16.167,19.149 16.167,21.648 22.268,27.749 26.186,27.749 v1(26.886,27.05)
  Bottom Layer w0.2: D1.16 v1(26.886,27.05)
Motor1_M+: D2.3 X2.4 | length 3.1
  Bottom Layer w0.6: D2.3 52.045,9.875 X2.4
Motor1_M-: D2.8 X2.5 | length 11.3
  Top Layer w0.6: v1(48.425,4.518) 48.425,7.285 X2.5
  Bottom Layer w0.6: v1(48.425,4.518) 48.45,4.493 48.45,3.804 48.73,3.525 D2.8
Motor2_M+: D2.13 X3.4 | length 11
  Signal Layer 1 w0.6: X3.4 39.734,9.12 v1(42.837,6.017)
  Bottom Layer w0.6: D2.13 41.821,3.525 42.837,4.541 v1(42.837,6.017)
Motor2_M-: D2.18 X3.5 | length 3.7
  Signal Layer 2 w0.6: X3.5 38.824,10.336 v1(38.824,10.208)
  Bottom Layer w0.6: v1(38.824,10.208) 39.157,9.875 D2.18
Motor3_M+: D3.3 X4.4 | length 3.1
  Bottom Layer w0.6: D3.3 33.925,9.875 X4.4
Motor3_M-: D3.8 X4.5 | length 22.9
  Bottom Layer w0.6: D3.8 27.851,3.525 26.632,4.744 26.632,12.875 27.19,13.434 32.906,13.434 X4.5
Motor4_M+: D3.13 X5.4 | length 11
  Signal Layer 1 w0.6: X5.4 21.649,9.12 v1(24.752,6.017)
  Bottom Layer w0.6: D3.13 23.939,3.525 24.752,4.338 v1(24.752,6.017)
Motor4_M-: D3.18 X5.5 | length 3.5
  Bottom Layer w0.6: X5.5 21.285,9.875 D3.18
Motor5_M+: D4.3 X6.4 | length 3.1
  Bottom Layer w0.6: D4.3 14.9,9.89 14.9,9.86 15.96,9.86 X6.4
Motor5_M-: D4.8 X6.5 | length 11.6
  Signal Layer 2 w0.6: v1(12.001,6.961) X6.5
  Bottom Layer w0.6: v1(12.001,6.961) 12.001,4.099 12.56,3.54 D4.8
Motor6_M+: D4.13 X7.4 | length 9.9
  Signal Layer 2 w0.6: X7.4 3.365,9.12 v1(5.88,6.605)
  Bottom Layer w0.6: D4.13 5.651,3.54 5.88,3.769 v1(5.88,6.605)
Motor6_M-: D4.18 X7.5 | length 3.5
  Bottom Layer w0.6: X7.5 3.27,9.89 D4.18
NetC2_1: C2.1 C3.2 D1.9 R3.2 | length 42.1
  Top Layer w0.2: R3.2 36.036,21.2 36.893,20.343 ; v1(36.893,21.206) 36.893,20.343 ; C2.1 47.557,18.45 47.307,18.2 C3.2 44.488,18.2 41.627,15.339 39.382,15.339 38.57,16.152 38.57,18.666 36.893,20.343
  Signal Layer 2 w0.2: v1(22.745,32.103) 23.939,32.103 25.819,30.223 27.876,30.223 v1(36.893,21.206)
  Bottom Layer w0.2: v1(22.745,32.103) 22.75,32.098 D1.9
NetC9_2: C9.2 D1.6 Z1.1 | length 20.8
  Top Layer w0.2: Z1.1 5.092,27.9 5.392,28.2 C9.2 10.934,28.2 12.754,30.02 19.875,30.02 v1(21.196,28.699)
  Bottom Layer w0.2: v1(21.196,28.699) 21.25,28.753 D1.6
NetC10_2: C10.2 D1.5 Z1.3 | length 37.8
  Top Layer w0.2: Z1.3 4.94,18.3 5.44,17.8 6.337,17.8 ; C10.2 6.337,17.8 ; v1(21.212,32.103) 22.837,30.477 22.837,28.496 22.441,28.099 20.297,28.099 19.24,29.156 14.998,29.156 12.103,26.261 6.54,26.261 6.337,26.058 6.337,17.8
  Bottom Layer w0.2: D1.5 20.75,31.641 v1(21.212,32.103)
NetD1_44: D1.44 R4.2 | length 36.3
  Top Layer w0.2: v1(38.519,21.2) R4.2
  Signal Layer 2 w0.2: v1(16.116,26.55) 19.002,29.436 25.235,29.436 25.285,29.385 25.285,24.381 26.225,23.441 27.19,23.441 27.546,23.797 27.546,25.651 27.978,26.083 28.46,26.083 34.099,20.444 37.763,20.444 v1(38.519,21.2)
  Bottom Layer w0.2: v1(16.116,26.55) D1.44
NetD5_6: D5.6 X8.5 | length 4.7
  Top Layer w0.2: D5.6 50.065,29.475 X8.5
NetD5_7: D5.7 X8.4 | length 3.9
  Top Layer w0.2: D5.7 50.101,30.125 50.246,29.98 X8.4
NetL1_1: L1.1 R3.1 | length 4.8
  Top Layer w0.2: L1.1 32.372,18.15 32.422,18.2 R3.1
NetVD1_1: VD1.1 X8.2 | length 11.7
  Top Layer w0.2: VD1.1 51.36,35.8 X8.2
SWCLK: D1.34 X1.3 | length 22
  Bottom Layer w0.2: D1.34 19.75,19.782 20.094,19.438 21.983,19.438 22.66,20.114 32.414,20.114 X1.3
SWDIO: D1.37 X1.4 | length 21.2
  Bottom Layer w0.2: D1.37 18.046,23.05 18.275,23.279 18.275,24.229 18.554,24.508 21.272,24.508 23.177,22.603 24.879,22.603 25.631,21.851 31.611,21.851 X1.4
pads on no net: D1.2 D1.3 D1.4 D1.7 D1.10 D1.17 D1.25 D1.26 D1.27 D1.28 D1.29 D1.30 D1.31 D1.38 D2. D3. D4. D5. D5.5 D6. Z1.

## Polygon pours and split planes (outlines as drawn)
GND on Bottom Layer "Top Layer- GND" (solid, remove dead copper, pour order 6): 0,0 54.3,0 54.3,40 0,40
GND on Top Layer "Top Layer- GND" (solid, remove dead copper, pour order 8): 0,0 54.3,0 54.3,40 0,40